# Altium PCB Project2_C.PcbDoc
Units mm, origin at the board's own origin, x right, y up, seen from the top; angles counter-clockwise.
Board outline 100 x 50 mm, 2 copper layers (Top Layer, Bottom Layer); 57 components, 59 nets, 255 pads, 70 vias.
Unrouted connection lines stored in the file: 1.
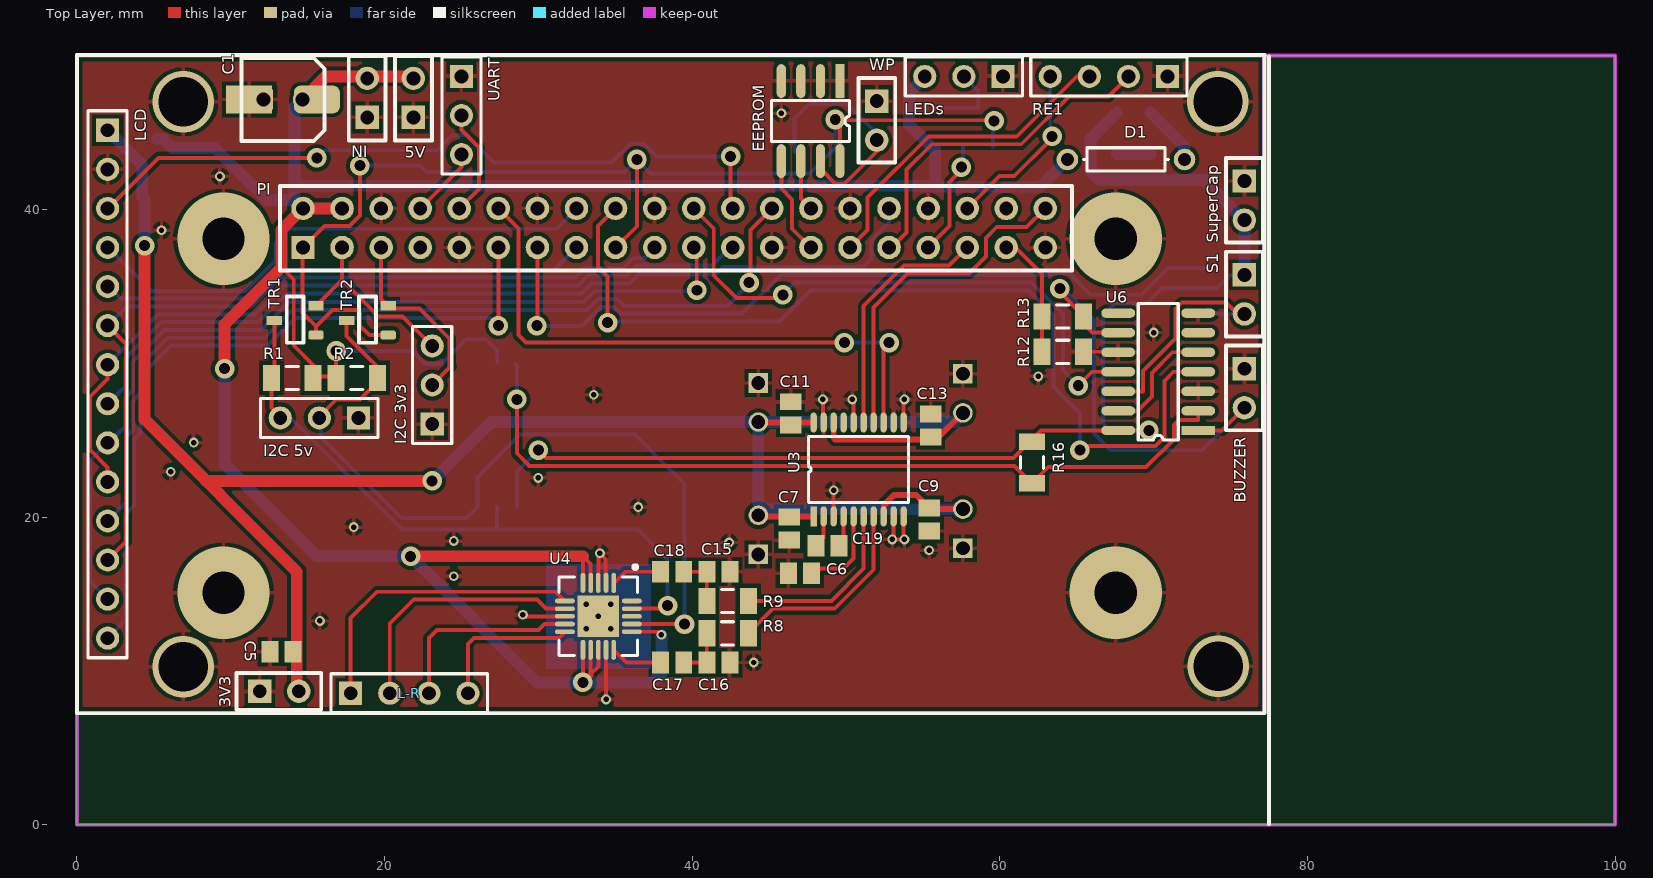
[diagram p0: Top Layer view]
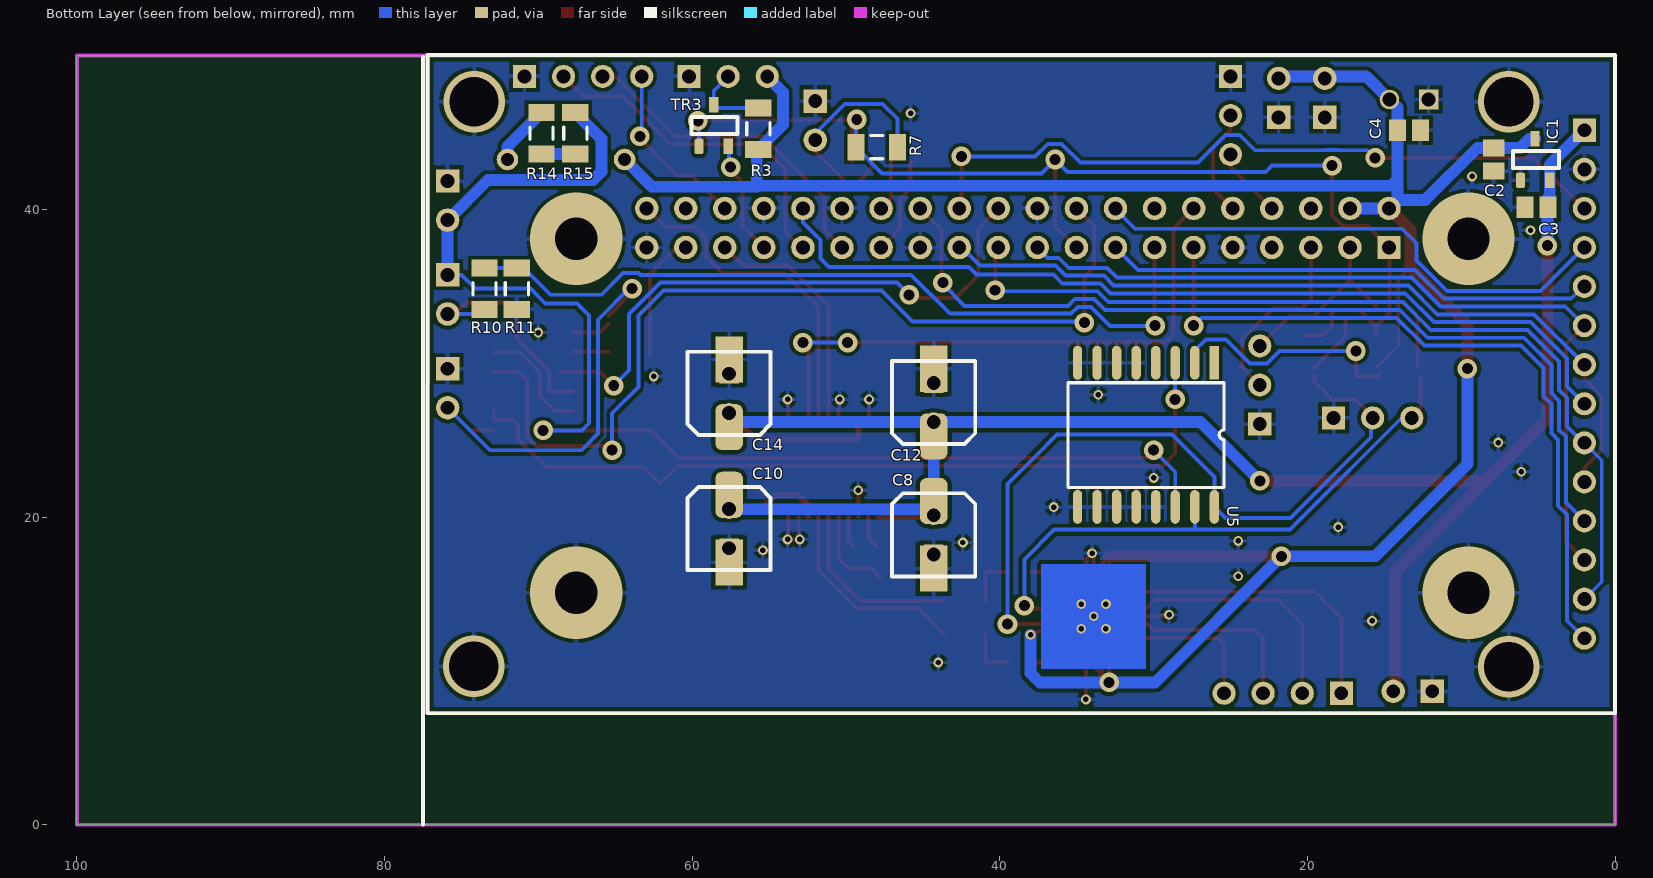
[diagram p1: Bottom Layer view, seen from below]

## Layer stack, top to bottom
Top Solder: solder mask 0.0102, Solder Resist, Dk 3.5
Top Layer: signal copper 0.0356
Dielectric 1: dielectric 0.32, FR-4, Dk 4.8
Bottom Layer: signal copper 0.0356
Bottom Solder: solder mask 0.0102, Solder Resist, Dk 3.5

## Board outline
0,0 100,0 100,50 0,50

## Design rules (kind name [scope] priority, off if disabled: settings)
Clearance [All] p1: gap=0.254
PolygonConnect [All] p1: connectstyle=Relief reliefconductorwidth=0.254 reliefentries=4 polygonreliefangle="90 Angle" airgapwidth=0.254
RoutingVias [All] p1: holewidth=0.711 width=1.27 viastyle="Through Hole" minholewidth=0.711 minwidth=1.27 maxholewidth=0.711 maxwidth=1.27
SolderMaskExpansion [All] p1: expansion=0.102
Width [All] p1: maxlimit=1.524 minlimit=0.254 preferedwidth=0.254
30 further rules are at their usual default settings.

## Components (designator, comment, footprint, x,y, rotation, side; value= is the part's Value field where it differs from the comment)
3V3 "" HDR1X2 11.887,8.677 r0 top
5V "" HDR1X2 21.873,45.983 r90 top
BUZZER "" HDR1X2 75.9,29.65 r270 top
C1 "" "SMD CAP 6X5" 13.4,47.15 r180 top
C2 "" C0805 7.9,43.248 r90 bottom
C3 "" C0805 5.1,40.15 r180 bottom
C4 "" C0805 13.4,45.15 r0 bottom
C5 "" C0805 13.3,11.25 r180 top
C6 "" C0805 47,16.35 r0 top
C7 "" C0805 46.3,19.25 r270 top
C8 "" "SMD CAP 6X5" 44.3,18.85 r270 bottom
C9 "" C0805 55.4,19.85 r270 top
C10 "" "SMD CAP 6X5" 57.6,19.25 r270 bottom
C11 "" C0805 46.4,26.75 r270 top
C12 "" "SMD CAP 6X5" 44.3,27.45 r90 bottom
C13 "" C0805 55.5,25.95 r90 top
C14 "" "SMD CAP 6X5" 57.6,28.05 r90 bottom
C15 "" C0805 41.7,16.45 r0 top
C16 "" C0805 41.7,10.55 r0 top
C17 "" C0805 38.7,10.55 r0 top
C18 "" C0805 38.7,16.45 r0 top
C19 "" C0805 48.8,18.15 r0 top
D1 "" AXIAL-0.3 68.2,43.25 r0 top
EEPROM "I²C SERIAL EEPROM" SOIC-8 47.7,45.75 r270 top
"I2C 3v3" "" HDR1X3 23.1,26.05 r90 top
"I2C 5v" "" HDR1X3 18.3,26.45 r180 top
IC1 "3v3" SOT-23A 5.2,43.248 r180 bottom
IN "" HDR1X2 18.873,45.983 r90 top
L-R "Header 4" HDR1X4 17.8,8.55 r0 top
LCD "TJCTM24024-SPI" HDR1X14 2,45.15 r270 top locked
LEDs "WS2812" HDR1X3 60.2,48.65 r180 top
PI "Raspberry Pi v2" HDR2X10 38.83,38.8 r90 top locked
R1 "" C1206 14,29.05 r0 top
R2 "" C1206 18.2,29.05 r180 top
R3 "" C1206 55.7,45.25 r90 bottom
R7 "" C1206 48,44.05 r0 bottom
R8 "" C1206 42.3,12.45 r180 top
R9 "" C1206 42.3,14.55 r180 top
R10 "" C1206 73.5,34.85 r270 bottom
R11 "" C1206 71.4,34.85 r90 bottom
R12 "" C1206 64.1,30.75 r180 top
R13 "" C1206 64.1,33.05 r180 top
R14 "" C1206 69.8,44.95 r270 bottom
R15 "" C1206 67.6,44.95 r90 bottom
R16 "" C1206 62.1,23.55 r90 top
RE1 "RotaryEncoder" HDR1X4 70.9,48.65 r180 top
S1 "Alarm reset" HDR1X2 75.9,35.75 r270 top
SuperCap "Supercap" HDR1X2 75.9,41.85 r270 top
TR1 "Level shifter" SOT-23A 14.192,32.785 r90 top
TR2 "Level shifter" SOT-23A 18.885,32.785 r90 top
TR3 "Level shifter" SOT-23A 58.6,45.45 r180 bottom
U3 "I²S DAC" TSSOP-20 47.9,20.05 r90 top
U4 "TPA2016D2" QFN20-TPA2016D2 33.9,13.55 r270 top
U5 "DS3231 RTC" "DS3231 SO-16" 30.5,25.35 r270 bottom
U6 "NOR gates" SOIC-14 70.3,29.45 r180 top
UART "" HDR1X3 25,48.65 r270 top
WP "Jumper" HDR1X2 52,47.05 r270 top

## Footprints (in the part's own frame and the unit in brackets; to place one, negate y for a bottom-side part, rotate by r counter-clockwise, add the part's x,y. Pads: shape width x height; smd on the part's side, far side on the other; paste and mask are expansions set on the pad)
AXIAL-0.3 [mm] "Axial Device, Thru-Hole; 2 Leads; 0.3 in Pin Spacing"
  round 1.4 hole 0.85: 1(-3.81,0) 2(3.81,0)
  silkscreen extent -2.77,-0.76 2.77,0.76
C0805 [mm] "Chip Capacitor, Body 2.0x1.3mm, IPC High Density"
  rect 1.1x1.4 smd: 1(-0.75,0) 2(0.75,0)
  body extent -1.1,-0.72 1.1,0.72, height 1.4
C1206 [mm] "Chip Capacitor, Body 3.2x1.6mm, IPC High Density"
  rect 1.1x1.7 smd: 1(-1.35,0) 2(1.35,0)
  silkscreen extent -0.4,-0.75 0.4,0.75, body extent -1.7,-0.9 1.7,0.9, height 1.3
"DS3231 SO-16" [mm]
  rect 2.2x0.6 smd: 1(-4.685,4.445)
  oval 2.2x0.6 smd: 2(-4.685,3.175) 3(-4.685,1.905) 4(-4.685,0.635) 5(-4.685,-0.635) 6(-4.685,-1.905) 7(-4.685,-3.175) 8(-4.685,-4.445) 9(4.685,-4.445) 10(4.685,-3.175) 11(4.685,-1.905) 12(4.685,-0.635) 13(4.685,0.635) 14(4.685,1.905) 15(4.685,3.175) 16(4.685,4.445)
  silkscreen extent -3.38,-5.08 3.41,5.08
HDR1X2 [mil] "2 Pin Header"
  rect 60x60 hole 35.43: 1(0,0)
  round 60 hole 35.43: 2(100,0)
  silkscreen extent -59,-47 157,47
HDR1X3 [mm] "Connector; Header; 3 Position"
  rect 1.5x1.5 hole 0.9: 1(0,0)
  round 1.5 hole 0.9: 2(2.54,0) 3(5.08,0)
  silkscreen extent -1.27,-1.27 6.35,1.27
HDR1X4 [mm] "Connector; Header; 4 Position"
  rect 1.5x1.5 hole 0.9: 1(0,0)
  round 1.5 hole 0.9: 2(2.54,0) 3(5.08,0) 4(7.62,0)
  silkscreen extent -1.27,-1.27 8.89,1.27
HDR1X14 [mm] "Connector; Header; 14 Position"
  rect 1.5x1.5 hole 0.9: 1(0,0)
  round 1.5 hole 0.9: 2(2.54,0) 3(5.08,0) 4(7.62,0) 5(10.16,0) 6(12.7,0) 7(15.24,0) 8(17.78,0) 9(20.32,0) 10(22.86,0) 11(25.4,0) 12(27.94,0) 13(30.48,0) 14(33.02,0)
  silkscreen extent -1.27,-1.27 34.29,1.27
HDR2X10 [mil] "20 pin Header"
  rect 60x60 hole 35.43: 1(-50,950)
  round 60 hole 35.43: 2(50,950) 3(-50,850) 4(50,850) 5(-50,750) 6(50,750) 7(-50,650) 8(50,650) 9(-50,550) 10(50,550) 11(-50,450) 12(50,450) 13(-50,350) 14(50,350) 15(-50,250) 16(50,250) 17(-50,150) 18(50,150) 19(-50,50) 20(50,50) 21(-50,-50) 22(50,-50) 23(-50,-150) 24(50,-150) 25(-50,-250) 26(50,-250) 27(-50,-350) 28(50,-350) 29(-50,-450) 30(50,-450) 31(-50,-550) 32(50,-550) 33(-50,-650) 34(50,-650) 35(-50,-750) 36(50,-750) 37(-50,-850) 38(50,-850) 39(-50,-950) 40(50,-950)
  silkscreen extent -109,-1019 107,1009
QFN20-TPA2016D2 [mm] "QFN, 20-Leads, Body 4,77x4,77mm, Pitch 0,50mm, Thermal Pad 2,70x2,70mm, IPC Low Density"
  rect 2.7x2.7 smd: 0(0,0)
  oct 1.3x0.3 smd: 1(-2.175,1)
  oval 1.3x0.3 smd: 2(-2.175,0.5) 3(-2.175,0) 4(-2.175,-0.5) 5(-2.175,-1) 11(2.175,-1) 12(2.175,-0.5) 13(2.175,0) 14(2.175,0.5) 15(2.175,1)
  oval 0.3x1.3 smd: 6(-1,-2.175) 7(-0.5,-2.175) 8(0,-2.175) 9(0.5,-2.175) 10(1,-2.175) 16(1,2.175) 17(0.5,2.175) 18(0,2.175) 19(-0.5,2.175) 20(-1,2.175)
  silkscreen extent -3.32,-2.55 2.55,2.55, body extent -2.4,-2.4 2.4,2.4, height 0.8
"SMD CAP 6X5" [mm]
  rrect50% 3x1.8 smd: 1(-2.2,0)
  round 1.27 hole 0.9: 1(-1.27,0)
  rect 1.27x1.27 hole 0.9: 2(1.27,0)
  rect 3x1.8 smd: 2(2.2,0)
  silkscreen extent -2.7,-2.7 2.7,2.7
SOIC-8 [mm]
  rect 2.2x0.6 smd: 1(-2.6,1.905)
  oval 2.2x0.6 smd: 2(-2.6,0.635) 3(-2.6,-0.635) 4(-2.6,-1.905) 5(2.6,-1.905) 6(2.6,-0.635) 7(2.6,0.635) 8(2.6,1.905)
  silkscreen extent -1.33,-2.54 1.34,2.54
SOIC-14 [mm]
  rect 2.2x0.6 smd: 1(-2.6,3.81)
  oval 2.2x0.6 smd: 2(-2.6,2.54) 3(-2.6,1.27) 4(-2.6,0) 5(-2.6,-1.27) 6(-2.6,-2.54) 7(-2.6,-3.81) 8(2.6,-3.81) 9(2.6,-2.54) 10(2.6,-1.27) 11(2.6,0) 12(2.6,1.27) 13(2.6,2.54) 14(2.6,3.81)
  silkscreen extent -1.3,-4.44 1.3,4.44
SOT-23A [mm]
  rrect50% 0.6x1 smd: 1(-0.95,-1.35)
  rect 0.6x1 smd: 2(0.95,-1.35) 3(0,1.35)
  silkscreen extent -1.45,-0.55 1.55,0.55
TSSOP-20 [mm]
  rect 1.3x0.4 smd: 1(0,0)
  oval 1.3x0.4 smd: 2(0,-0.65) 3(0,-1.3) 4(0,-1.95) 5(0,-2.6) 6(0,-3.25) 7(0,-3.9) 8(0,-4.55) 9(0,-5.2) 10(0,-5.85) 11(6.1,-5.85) 12(6.1,-5.2) 13(6.1,-4.55) 14(6.1,-3.9) 15(6.1,-3.25) 16(6.1,-2.6) 17(6.1,-1.95) 18(6.1,-1.3) 19(6.1,-0.65) 20(6.1,0)
  silkscreen extent 0.9,-6.18 5.2,0.33

## Part data
3V3 5V IN: library part "Header 2", "Header, 2-Pin"
BUZZER: library part Bell, "Electrical Bell"
C1 SuperCap: library part "Cap Pol1", "Polarized Capacitor (Radial)"
C2 C3 C4 C5 C6 C7 C9 C11 C13 C15 C16 C17 C18 C19: library part Cap, "Capacitor"
C8 C10 C12 C14: library part "Cap Pol2", "Polarized Capacitor (Axial)"
D1: library part Diode, "Default Diode"
"I2C 3v3" "I2C 5v" LEDs UART: library part "Header 3", "Header, 3-Pin"
IC1: library part MCP1703, "Power regulator"
L-R: "Header, 4-Pin"
LCD: "LCD module"
PI: library part RaspberryPiV2, "Raspberry Pi v2 Header"
R1 R2 R3 R7 R8 R9 R10 R11 R12 R13 R14 R15 R16: library part Res2, "Resistor"
RE1: library part "Header 4", "Header, 4-Pin"
S1: library part SW-PB, "Switch"
TR1 TR2 TR3: library part AN10441, "Level Shifter"
U3: library part PCM5102A
U4: "I²C Audio Amplifier"
U5: library part DS3231, "RTC"
U6: library part 744002, "Dual 4-input NOR gate"

## Via types
v1: diameter 1.27, hole 0.711, Top Layer to Bottom Layer, tented both sides, 30 vias
v2: diameter 0.635, hole 0.356, Top Layer to Bottom Layer, tented both sides, 27 vias
v3: diameter 0.635, hole 0.356, Top Layer to Bottom Layer, 5 vias
v4: diameter 4, hole 3.2, Top Layer to Bottom Layer, 4 vias
v5: diameter 6, hole 2.75, Top Layer to Bottom Layer, 4 vias

## Nets (pads, with @x,y where several pads share a name; then routed paths per layer and width w, separated by ;. In a path a pad name is that pad's centre, name@x,y a point inside that pad or via, vN(x,y) a via of type N, cw(c..) or ccw(c..) an arc to the next point about the centre after c; other vN are vias at no path point)
3V3: 3V3.2 C3.2 C5.1 C7.1 C8.1 C9.1 C10.1 C11.2 C12.1 C13.1 C14.1 IC1.2 LCD.1 U3.1 U3.8 U3.17 U3.18 U3.20 | length 136.1
  Top Layer w0.381: C8.1@44.3,20.12 44.37,20.05 U3.1 ; C12.1@44.3,26.18 44.33,26.15 U3.20 ; U3.18 49.206,26.15 49.206,25.142 49.292,25.055 55.875,25.055 C14.1@57.6,26.78 ; U3.8 52.456,20.055 52.456,20.767 53.139,21.45 54.55,21.45 C9.1 55.48,20.52 C10.1@57.6,20.52
  Top Layer w0.762: v1(4.4,37.65) 4.4,26.35 14.3,16.45 3V3.2@14.3,8.55 ; 8.4,22.35 v1(23.1,22.35)
  Bottom Layer w0.762: LCD.1@1.965,45.15 LCD.1 4.25,42.9 C3.2@4.25,40.85 ; C3.2@4.35,40.75 4.4,40.7 v1(4.4,37.65) ; v1(23.1,22.35) 26.93,26.18 C12.1@44.3,26.18 ; C10.1@57.6,20.52 44.7,20.52 44.3,20.12 44.3,21.05 44.3,25.25 C12.1@44.3,26.18 ; C14.1@57.6,26.78 57,26.18 C12.1@44.3,26.18
3V3PI: EEPROM.8 PI.1 PI.17 R7.2 TR1.1 TR2.1 TR3.1 | length 76.2
  Top Layer w0.254: v1(18.4,42.85) 18.4,39.614 17.713,38.927 16.097,38.927 PI.1 14.661,37.491 14.661,33.277 14.884,33.054 14.896,33.054 15.542,32.408 ; TR2.1 19.015,31.835 18.416,32.434 18.416,33.243 18.193,33.466 16.616,33.466 15.55,32.4 15.542,32.408 ; PI.17 36.4,38.91 v1(36.4,43.25) ; EEPROM.8 49.605,45.345 49.3,45.65 v1(49.3,45.85) 49.35,45.8 v1@59.4,45.8 ; v1@59.434,45.766 v1(59.623,45.766) ; 15.542,32.408 TR1.1 15.542,32.408
  Bottom Layer w0.254: v1(18.4,42.85) 22.3,42.85 22.711,42.439 35.589,42.439 v1(36.4,43.25) 37.3,42.35 47.65,42.35 R7.2 49.35,45.8 v1(49.3,45.85) ; TR3.1 59.55,45.693 v1(59.623,45.766)
5V: 5V.2 C1.1 C2.2 C4.2 D1.1 IC1.3 IN.2 LEDs.3 PI.2 PI.4 R1.2 R2.2 R3.1 U4.4 U4.5 U4.11 U4.12 U4.13 U4.16 U5.2 | length 200
  Top Layer w0.254: 13.303,36.247 14.1,35.45 14.1,31.15 R1.2@15.45,29.8 ; R1.2@15.35,29.3 15.35,29.15 16.85,29.15 v1(16.85,30.8) ; v1@32.9,9.65 U4.11 ; U4.5 32.9,17.45 33.4,16.95 U4.4 ; 33.4,9.75 33.4,9.8 ; U4.12 33.4,9.8 ; U4.13 33.9,10.3 33.4,9.8 ; U4.16 37.8,12.55 v2(38,12.35)
  Top Layer w0.381: v1(32.9,9.25) 33.4,9.75
  Top Layer w0.762: v1(9.6,29.65) 9.6,32.544 13.303,36.247 13.303,38.673 PI.2 PI.4 ; C1.1@14.67,47.15 16.17,48.65 5V.2@22,48.65 ; v1(21.7,17.45) 32.9,17.45
  Bottom Layer w0.254: v1(16.85,30.8) 21.831,30.8 22.632,29.999 23.749,29.999 25.3,31.55 26.6,31.55 27.325,30.825 U5.2
  Bottom Layer w0.762: IC1.3 5.595,44.598 6.195,43.998 C2.2 8.952,43.998 12.33,40.62 14.15,40.62 ; v1(9.6,29.65) 9.6,23.45 15.6,17.45 v1(21.7,17.45) 29.9,9.25 v1(32.9,9.25) 37.4,9.25 38,9.85 v2(38,12.35) ; PI.4 PI.2 14.15,40.62 ; 5V.2@22,48.65 16.17,48.65 14.67,47.15 14.15,46.63 C4.2 14.15,41.95 ; LEDs.3 54.1,47.63 54.1,45.5 R3.1 ; 55.8,41.65 R3.1@55.8,43.9 ; D1.1 62.62,41.48 55.77,41.48 55.7,41.55 14.55,41.55 14.15,41.95 ; 14.15,40.62 14.15,41.95
5VBCK: R15.2 R16.2 S1.1 SuperCap.2 U5.14 U6.14 | length 84.8
  Top Layer w0.254: v1(30,24.35) 30.5,23.85 60.9,23.85 62.69,25.64 U6.14 v1(69.69,25.64)
  Bottom Layer w0.254: U5.14 28.595,22.945 v1(30,24.35) ; v1(69.69,25.64) 67.16,25.64 66.7,26.1 66.7,33.1 67.5,33.9 69.55,33.9 70.5,34.85 74.089,34.85 74.989,35.75 S1.1
  Bottom Layer w0.762: R15.2 65.9,44.6 65.9,42.45 66.435,41.915 73.295,41.915 SuperCap.2 S1.1
BUZZ: PI.37 R12.2 R13.2 | length 8.4
  Top Layer w0.254: PI.37 61.02,37.53 62.75,35.8 R12.2@62.75,30.45
"CE 0": LCD.3 PI.24 | length 47.7
  Top Layer w0.254: LCD.3 2.02,40.07 5.3,43.35 v1(15.6,43.35) ; v1@42.5,43.67 42.5,40.21 PI.24
  Bottom Layer w0.254: v1(15.6,43.35) 16.1,43.85 17.963,43.85 17.979,43.866 18.821,43.866 18.837,43.85 23.4,43.85 24.4,44.85 25.319,44.85 27.119,43.05 34.763,43.05 35.979,44.266 36.884,44.266 37.7,43.45 v1(42.5,43.45)
"CE 1": LCD.11 PI.26 | length 58.7
  Top Layer w0.254: v1(43.7,35.25) 43.783,35.333 43.783,38.673 PI.26
  Bottom Layer w0.254: LCD.11 3.2,20.95 3.2,25.232 3.639,25.671 3.639,27.552 4.147,28.06 4.147,29.897 5.911,31.661 12.193,31.661 13.998,33.466 33.161,33.466 33.869,34.174 35.131,34.174 35.571,33.734 42.284,33.734 43.7,35.15 v1(43.7,35.25)
CLK: PI.12 U3.13 | length 38.6
  Top Layer w0.254: PI.12 28.7,38.77 28.7,31.85 29.2,31.35 v1(49.9,31.35) ; U3.13 52.45,31.3 52.5,31.35 v1(52.8,31.35)
  Bottom Layer w0.254: v1(49.9,31.35) v1(52.8,31.35)
DC_LCD: LCD.5 PI.15 | length 32.2
  Bottom Layer w0.254: LCD.5 2.06,34.99 2.849,34.201 11.141,34.201 13.014,36.074 31.024,36.074 PI.15
DIN: PI.38
DOUT: PI.40 U3.14 | length 22
  Top Layer w0.254: U3.14 51.784,26.166 51.784,33.634 53.992,35.842 56.91,35.842 56.918,35.85 58,35.85 59.1,36.95 59.1,38.15 59.8,38.85 61.74,38.85 PI.40
FS: PI.35 U3.15 | length 15.9
  Top Layer w0.254: U3.15 51.15,33.718 53.782,36.35 56.7,36.35 PI.35
GND: 3V3.1 5V.1 "I2C 3v3.1" "I2C 5v.1" BUZZER.1 C1.2 C2.1 C3.1 C4.1 C5.2 C6.1 C7.2 C8.2 C9.2 C10.2 C11.1 C12.2 C13.2 C14.2 C15.2 C16.2 EEPROM.1 EEPROM.2 EEPROM.3 EEPROM.4 IC1.1 IN.1 LCD.2 LEDs.1 PI.6 PI.9 PI.14 PI.20 PI.25 PI.30 PI.34 PI.39 R11.1 R12.1 RE1.1 SuperCap.1 U3.3 U3.9 U3.10 U3.11 U3.12 U3.16 U3.19 U4.2 U4.3 U4.8 U4.14 U5.5 U5.6 U5.7 U5.8 U5.9 U5.10 U5.11 U5.12 U5.13 U6.3 U6.7 U6.10 UART.1 WP.1 | length 22.1
  Top Layer w0.254: v2(29,13.65) 29.1,13.55 U4.8 ; U4.3 33.9,17.55 v2(34,17.65) 34.369,17.281 U4.2@34.369,15.725 ; v2(34.4,8.15) U4.14 ; U3.19@48.5,26.2 v2(48.5,27.65) ; U3.3 v2(49.2,21.75) ; v2(50.4,27.65) 50.5,27.55 U3.16 ; v2(53,18.55) v2(53.8,18.55) ; v2@53.1,18.65 U3.9 ; v2@53.75,18.6 U3.10 ; U3.11 v2@53.75,27.6 ; R12.1 67.67,30.75 U6.10
  other v2: 44,10.55 15.8,13.25 24.5,16.15 55.4,17.85 42.4,18.35 24.5,18.45 18,19.35 36.5,20.65 30,22.55 6.1,22.95 7.6,24.85 53.8,27.65 33.6,27.95 62.5,29.15 70,32 5.5,38.65 9.3,42.15 45.8,46.25
  other v4: 6.92,10.27 74.2,10.3 6.92,47 74.18,47
  other v5: 9.53,15.09 67.53,15.09 9.53,38.09 67.53,38.09
IRQ: LCD.14 PI.11 | length 48
  Top Layer w0.254: v1(27.4,32.45) PI.11
  Bottom Layer w0.254: LCD.14 3.131,13.261 3.131,20.163 3.708,20.74 3.708,25.021 4.147,25.46 4.147,27.342 4.655,27.85 4.655,29.687 6.121,31.153 12.403,31.153 14.2,32.95 26.9,32.95 v1(27.4,32.45)
MISO: LCD.9 LCD.13 PI.21 | length 58.7
  Top Layer w0.254: PI.21 40.3,37.33 v1(40.3,34.75)
  Bottom Layer w0.254: LCD.13 0.869,15.801 0.869,23.699 LCD.9 2.115,24.945 2.195,24.945 3.131,25.881 3.131,27.763 3.639,28.271 3.639,30.107 5.701,32.169 11.983,32.169 13.788,33.974 32.95,33.974 33.658,34.682 40.368,34.682 v1(40.3,34.75)
MOSI: LCD.6 LCD.12 PI.19 | length 53.9
  Top Layer w0.254: LCD.12 3.2,18.41 3.2,31.25 LCD.6
  Bottom Layer w0.254: LCD.6 3.243,33.693 11.351,33.693 13.224,35.566 32.387,35.566 33.027,36.206 35.519,36.206 36.171,36.858 36.888,36.858 PI.19
NetBUZZER_2: BUZZER.2 R13.1 U6.1 U6.9 | length 30.6
  Top Layer w0.254: v1(63.9,34.85) 63.9,34.634 R13.1@65.45,33.084 ; R13.1@65.45,32.55 66.01,31.99 U6.9 ; U6.1 74.43,25.64 BUZZER.2
  Bottom Layer w0.254: v1(63.9,34.85) 63.9,35.05 66.116,32.834 66.116,25.434 67.2,24.35 73.14,24.35 BUZZER.2
NetC6_2: C6.2 U3.5 | length 6
  Top Layer w0.254: C6.2@47.75,16.05 48.35,16.65 49.839,16.65 50.5,17.311 U3.5
NetC15_1: C15.1 C18.2 R9.2 | length 3.4
  Top Layer w0.254: C18.2 C15.1 R9.2
NetC16_1: C16.1 C17.2 R8.2 | length 3.4
  Top Layer w0.254: C17.2 C16.1 R8.2
NetC17_1: C17.1 U4.15 | length 3.4
  Top Layer w0.254: U4.15 35.725,10.55 C17.1
NetC18_1: C18.1 U4.1 | length 3.3
  Top Layer w0.254: U4.1@34.931,15.725 35.656,16.45 C18.1
NetC19_1: C19.1 U3.2 | length 2.1
  Top Layer w0.254: C19.1 48.55,18.65 U3.2
NetC19_2: C19.2 U3.4 | length 2
  Top Layer w0.254: C19.2 49.85,18.45 U3.4
NetD1_2: D1.2 R14.1 | length 4
  Bottom Layer w0.762: R14.1 72.01,44.09 D1.2
NetEEPROM_5: EEPROM.5 PI.27 | length 6.4
  Top Layer w0.254: EEPROM.5 45.795,41.355 46.5,40.65 46.5,38.75 PI.27
NetEEPROM_6: EEPROM.6 PI.28 | length 3.4
  Top Layer w0.254: EEPROM.6 47.065,40.725 PI.28
NetEEPROM_7: EEPROM.7 R7.1 WP.2 | length 15.5
  Top Layer w0.254: EEPROM.7 48.335,42.657 49.323,41.669 49.887,41.669 52,43.782 WP.2 WP.2@51.879,44.631
  Bottom Layer w0.254: R7.1@46.65,43.75 46.65,45.9 47.616,46.866 50.084,46.866 52,44.95 WP.2
"NetI2C 5v_2": "I2C 5v.2" R2.1 TR2.3 U4.17 U5.16 | length 54
  Top Layer w0.254: 15.8,26.55 15.76,26.55 16.86,27.65 18.4,27.65 19.55,28.8 R2.1@19.55,29.15 ; TR2.3 17.535,31.765 R2.1@19.65,29.65 ; U4.17 v1(39.5,13.05)
  Bottom Layer w0.254: 15.86,27.05 15.86,25.19 21.1,19.95 25.34,19.95 U5.16 26.055,22.605 28.816,25.366 36.284,25.366 37.764,23.886 39.5,22.15 v1(39.5,13.05)
"NetI2C 5v_3": "I2C 5v.3" R1.1 TR1.3 U4.19 U5.15 | length 42.1
  Top Layer w0.254: R1.1@12.65,29.15 12.65,27.12 13.22,26.55 ; R1.1@12.842,29.742 TR1.3 ; U4.19 38.4,14.05 v1(38.4,14.25)
  Bottom Layer w0.254: 13.32,27.05 13.32,27.012 21.148,19.184 27.3,19.184 ; U5.15 27.3,20.665 27.3,19.184 ; v1(38.4,14.25) 38.4,17.25 36.466,19.184 27.3,19.184
NetL-R_1: L-R.1 U4.6 | length 19.8
  Top Layer w0.254: L-R.1 17.8,13.45 19.5,15.15 31.125,15.15 U4.6
NetL-R_2: L-R.2 U4.7 | length 16.8
  Top Layer w0.254: L-R.2 20.34,13.082 21.9,14.642 29.908,14.642 30.5,14.05 U4.7
NetL-R_3: L-R.3 U4.9 | length 12.8
  Top Layer w0.254: L-R.3 22.88,12.13 23.408,12.658 30.008,12.658 30.4,13.05 U4.9
NetL-R_4: L-R.4 U4.10 | length 9.8
  Top Layer w0.254: L-R.4 25.42,11.762 25.808,12.15 31.356,12.15 U4.10@31.725,12.519
NetLEDs_2: LEDs.2 R3.2 TR3.3 | length 5.3
  Bottom Layer w0.254: R3.2 58.6,46.6 58.6,47.71 LEDs.2
NetR8_1: R8.1 U3.7 | length 13.3
  Top Layer w0.254: R8.1 45.25,14.05 49.268,14.05 51.8,16.582 U3.7
NetR9_1: R9.1 U3.6 | length 11.8
  Top Layer w0.254: R9.1 45.032,14.55 45.04,14.558 49.058,14.558 51.15,16.65 U3.6
NetR10_2: R10.2 S1.2 U6.12 | length 15.3
  Top Layer w0.254: U6.12 69.3,28.18 69.3,29.5 71.419,31.619 71.419,33.542 71.827,33.95 74.7,33.95 75.44,33.21 S1.2
  Bottom Layer w0.254: R10.2 73.79,33.21 S1.2
NetR14_2: R14.2 R15.1 | length 2.2
  Bottom Layer w0.762: R15.1 R14.2
NetR16_1: R16.1 U5.3 U6.2 | length 53.8
  Top Layer w0.254: v1(28.6,27.65) 28.6,24.15 29.4,23.35 29.4,23.334 60.966,23.334 R16.1 63.15,23.25 69.516,23.25 71.316,25.05 71.316,25.995 71.642,26.321 72.9,26.321 U6.2
  Bottom Layer w0.254: U5.3@28.5,29.94 28.6,29.84 v1(28.6,27.65)
NetRE2_1: 
NetRE2_2: 
NetRE2_3: 
NetRE2_4: 
NetU6_5: U6.5 U6.13 | length 7.7
  Top Layer w0.254: U6.13 68.96,26.91 69.9,27.85 69.9,29.382 71.238,30.72 U6.5
"PWM 0": LCD.8 PI.32 | length 58.4
  Bottom Layer w0.254: LCD.8 2.004,27.374 2.024,27.374 3.131,28.481 3.131,30.318 5.49,32.677 11.772,32.677 13.645,34.55 32.808,34.55 33.448,35.19 35.94,35.19 36.516,35.766 41.516,35.766 42.016,36.266 51.116,36.266 51.657,36.807 51.657,38.003 52.8,39.146 PI.32
"PWM 1": PI.33 TR3.2 | length 7.3
  Top Layer w0.254: PI.33 56.737,38.927 56.737,41.787 v1@57.5,42.55
  Bottom Layer w0.254: v1(57.5,42.75) 57.6,42.85 TR3.2@57.6,44.05
RE_A: PI.36 RE1.4 | length 11.8
  Top Layer w0.254: PI.36 59.979,42.169 60.937,42.169 v1@63.318,44.55
  Bottom Layer w0.254: PI.36 PI.36@58.42,40.07 ; RE1.4 63.28,44.87 v1(63.4,44.75)
RE_B: PI.29 RE1.3 | length 21.4
  Top Layer w0.254: PI.29 50.28,37.53 51.403,38.653 51.403,40.771 55.382,44.75 61.1,44.75 65,48.65 RE1.3
RE_S: PI.31 RE1.2 | length 22.6
  Top Layer w0.254: PI.31 52.98,37.53 53.943,38.493 53.943,42.593 55.592,44.242 61.392,44.242 64.5,47.35 67.06,47.35 RE1.2
RESET: PI.22 U6.11 | length 38.4
  Top Layer w0.254: PI.22 41.4,38.77 41.4,35.713 42.879,34.234 45.684,34.234 v1(45.9,34.45) ; v1(65.1,28.55) 66,29.45 U6.11 U6.11@68.6,29.45
  Bottom Layer w0.254: v1(45.9,34.45) 46.692,35.242 62.071,35.242 64.1,33.213 64.1,29.55 v1(65.1,28.55)
RESET_LCD: LCD.4 PI.16 | length 34.6
  Bottom Layer w0.254: LCD.4 2.02,37.55 2.02,37.53 4.841,34.709 10.93,34.709 12.911,36.69 12.911,37.804 13.857,38.75 31.2,38.75 32.48,40.03 PI.16
RX: PI.10 UART.2 | length 7
  Top Layer w0.254: PI.10 26.131,41.341 26.131,44.038 25,45.169 UART.2
SCK: "I2C 3v3.2" PI.5 TR2.2 | length 12.4
  Top Layer w0.254: PI.5 19.78,34.19 TR2.2 20.408,33.562 22.267,33.562 24.231,31.598 24.231,29.859 24.3,29.79 23.1,28.59
SCLK: LCD.7 LCD.10 PI.23 | length 52.4
  Top Layer w0.254: LCD.10 2,23.231 0.869,24.362 0.869,27.838 2,28.969 LCD.7
  Bottom Layer w0.254: LCD.7 5.275,33.185 11.562,33.185 13.435,35.058 32.597,35.058 33.237,35.698 35.73,35.698 36.382,36.35 41.286,36.35 42.466,37.53 PI.23
SDA: "I2C 3v3.3" PI.3 TR1.2 | length 12.2
  Top Layer w0.254: TR1.2 17.24,35.433 ; PI.3 17.24,35.433 ; 23.1,31.13 21.176,33.054 19.577,33.054 19.354,33.277 19.354,33.319 17.24,35.433
SET: PI.18 U6.4 | length 60.5
  Top Layer w0.254: v1(34.5,32.65) 34.5,35.634 34.508,35.642 33.877,36.273 33.877,38.927 PI.18 ; v1(65.2,24.35) 65.2,24.398 65.426,24.624 70.111,24.624 70.706,25.219 70.706,28.856 71.3,29.45 U6.4
  Bottom Layer w0.254: v1(34.5,32.65) 34.5,32.35 34.868,32.718 45.668,32.718 47.684,34.734 61.861,34.734 63.5,33.095 63.5,28.45 65.2,26.75 v1(65.2,24.35)
SW: PI.13 R10.1 R11.2 | length 51.8
  Top Layer w0.254: v1(29.9,32.45) 29.94,32.49 PI.13
  Bottom Layer w0.254: v1(29.9,32.45) 29.924,32.426 32.839,32.426 34.079,33.666 34.921,33.666 35.361,33.226 43.239,33.226 45.763,35.75 63.363,35.75 63.479,35.866 64.484,35.866 65.892,34.458 69.208,34.458 70.95,36.2 R11.2 R10.1
TX: PI.8 UART.3 | length 4.6
  Top Layer w0.254: PI.8 25,42.75 UART.3
pads on no net: PI.7 U4.0 U4.18 U4.20 U5.1 U5.4 U6.6 U6.8
copper on no net:
  other v3: 33.1,12.75 34.7,12.75 33.9,13.55 33.1,14.35 34.7,14.35

## Polygon pours and split planes (outlines as drawn)
GND on Bottom Layer "GND_L02_P000" (solid, remove dead copper, pour order 0): 0,50 77.175,50 77.175,7.3 77.175,7.275 0,7.275
GND on Top Layer "GND_L01_P002" (solid, remove dead copper, pour order 2): 0,50 0,7.3 77.175,7.3 77.175,50

## Keep-outs
Keep-Out Layer:
  lines w0.254: 0,7.3 77.18,7.28 ; 77.18,50 77.2,7.3 ; 0,0 100,0 100,50 0,50 0,0

## Other copper
Bottom Layer:
  region: 30.5,10.15 37.3,10.15 37.3,16.95 30.5,16.95

## Silkscreen, mask and mechanical layers (free items; w line width, h text height)
Top Overlay:
  lines w0.254: 77.5,0.05 77.5,49.95 ; 0,7.25 77.2,7.25 77.2,50.05 0,50.05 0,7.25
Bottom Overlay:
  lines w0.254: 77.5,0 77.5,49.9 ; 0,7.25 77.2,7.25 77.2,50.05 0,50.05 0,7.25
Mechanical 1:
  lines w0.254: 77.18,7.28 0,7.3 0,50 ; 77.2,7.3 77.18,50 0,50 ; 0,50 0,0 100,0 100,50 0,50
Mechanical 13:
  the board outline again, w0.254
Mechanical 15:
  the board outline again, w0.254

## Panel: embedded boards
"Rect.PcbDoc" at 77.8,0, 1 rows x 1 columns, spacing 63.5 x 38.1, rotation 0
"Stick2.PcbDoc" at 0,0, 1 rows x 1 columns, spacing 63.5 x 38.1, rotation 0